# Altium PCB Inc_filter_v2.PcbDoc (part 2 of 4)
Units mm, origin at the board's own origin, x right, y up, seen from the top; angles counter-clockwise.
Board outline 339.6 x 339.6 mm, 2 copper layers (Top Layer, Bottom Layer); 640 components, 290 nets, 1708 pads, 357 vias.
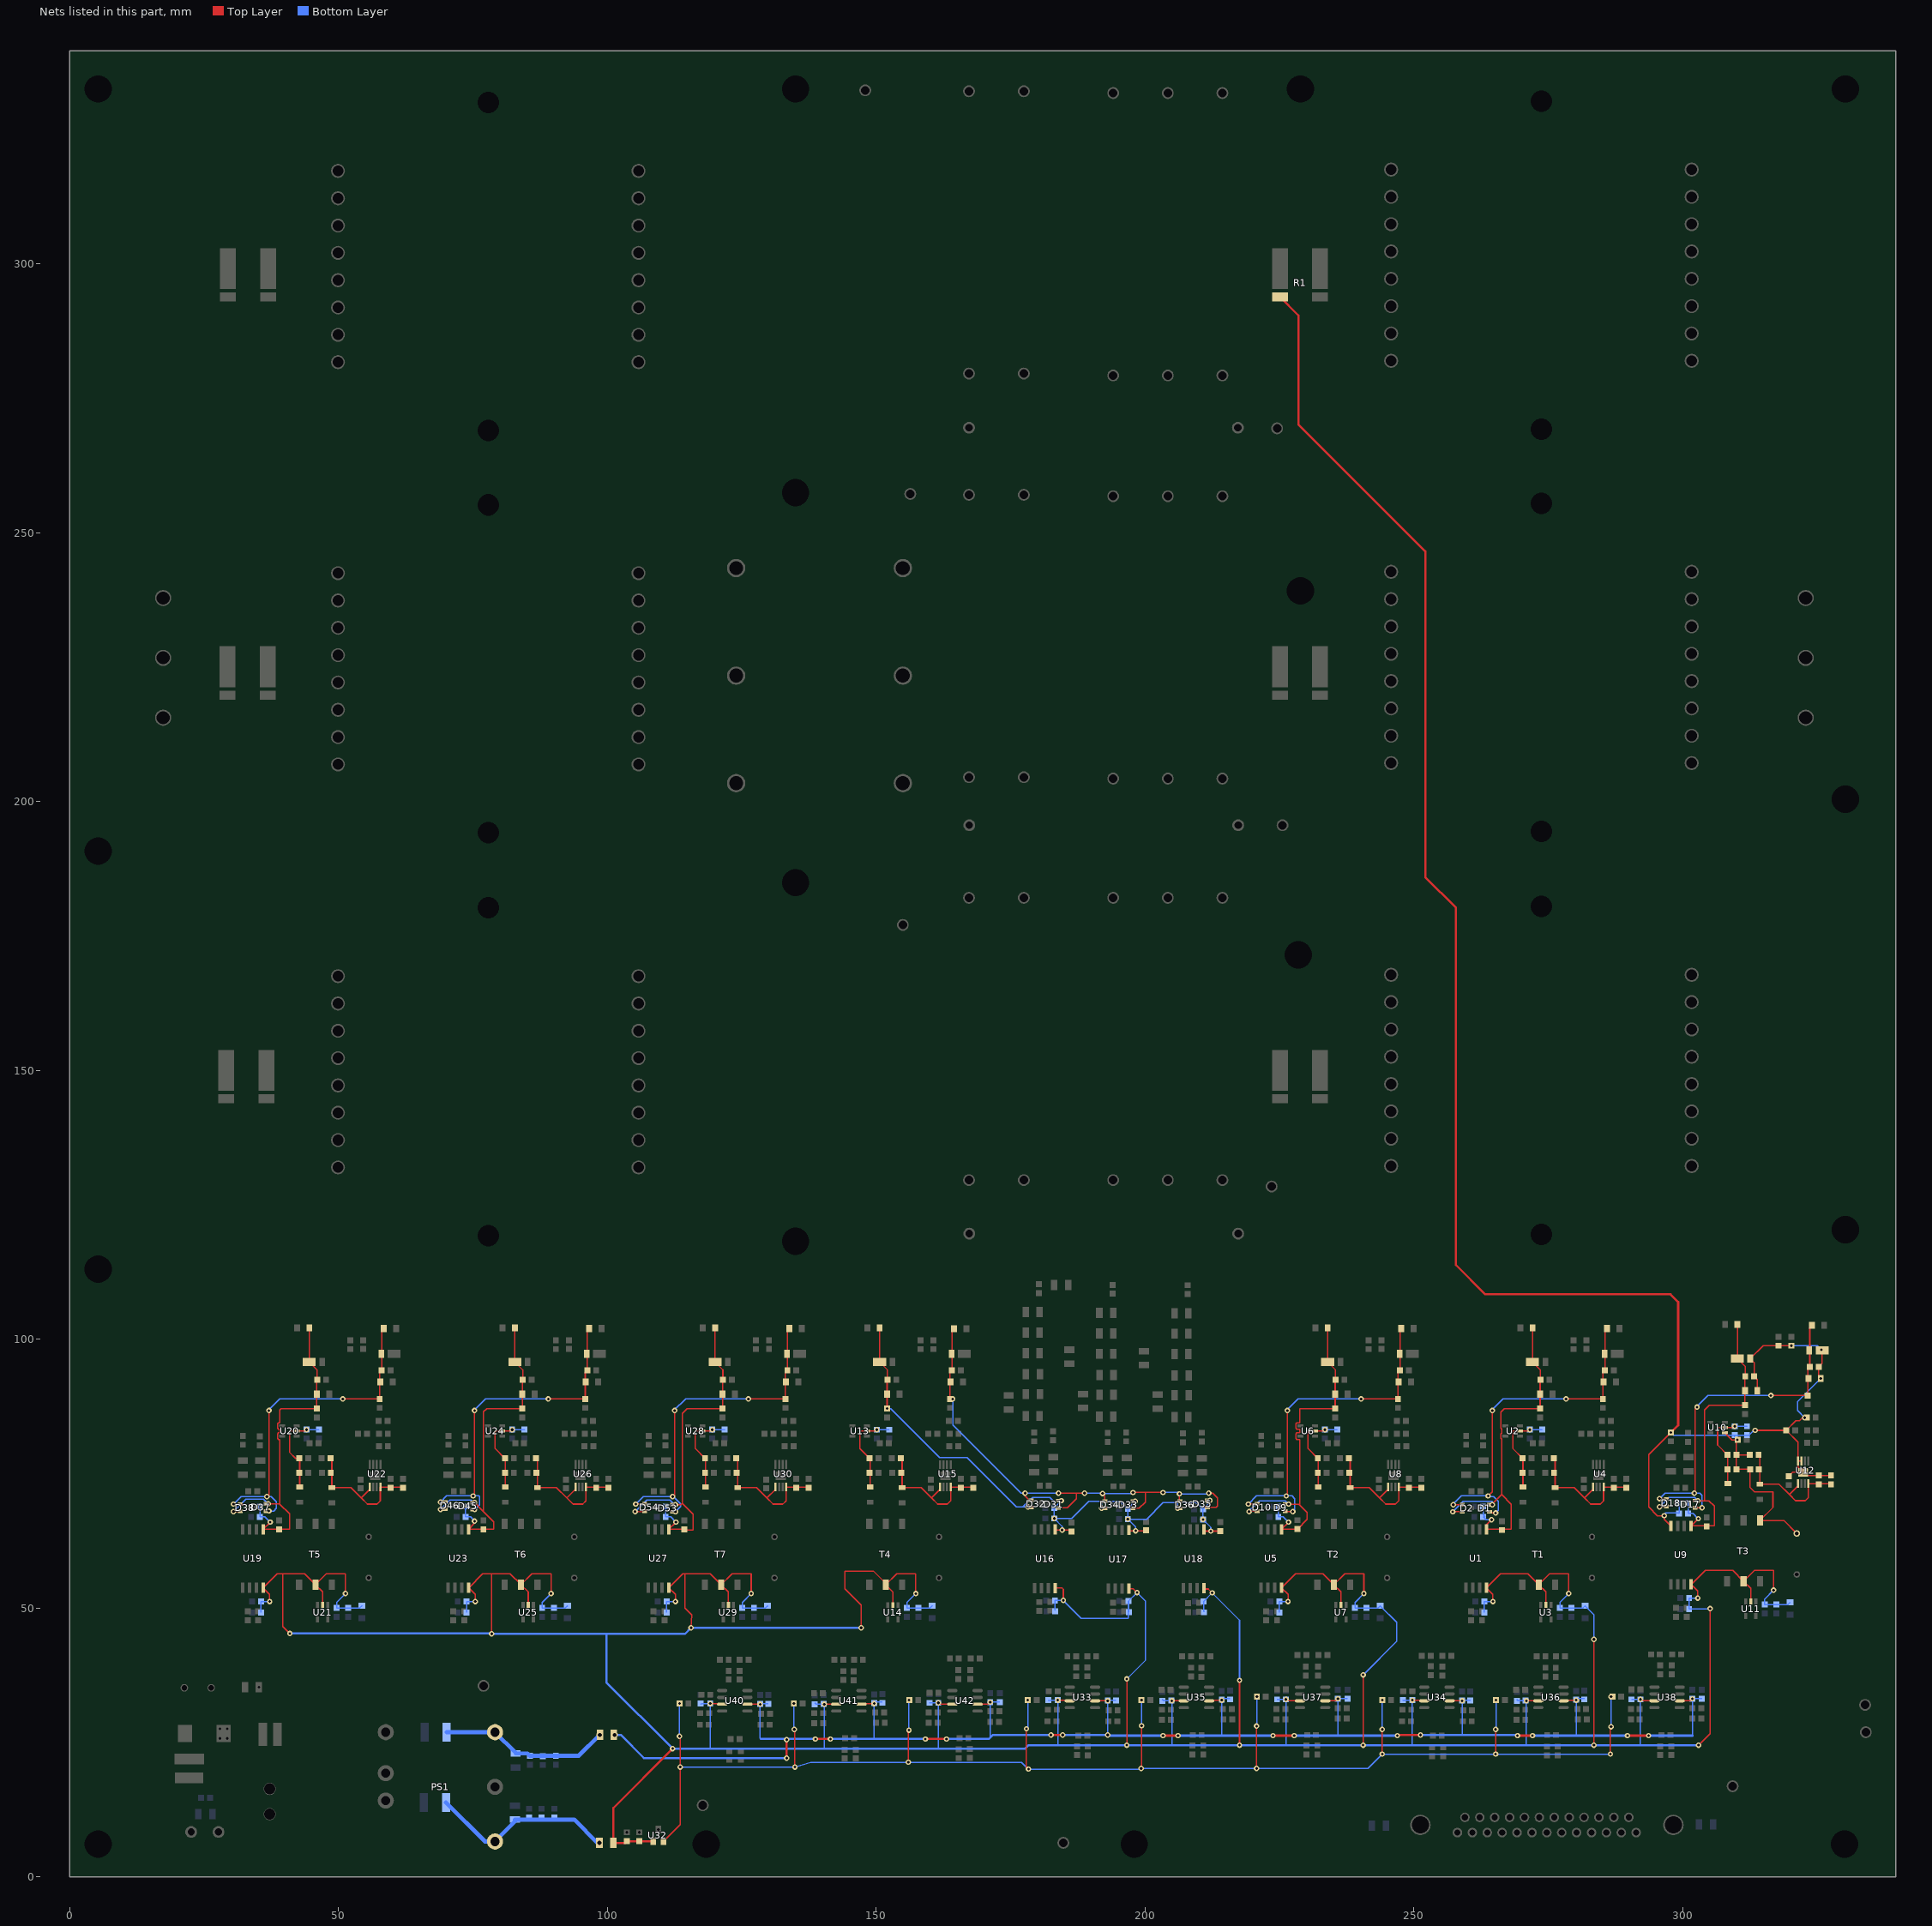
[diagram p2: the nets of this part, all layers, seen from the top]

## Footprints (in the part's own frame and the unit in brackets; to place one, negate y for a bottom-side part, rotate by r counter-clockwise, add the part's x,y. Pads: shape width x height; smd on the part's side, far side on the other; paste and mask are expansions set on the pad) (continued)
"6-DIP Module" [mm] "PYB10"
  round 3 hole 1.7: 1(0,-7.62) 2(0,-12.7) 3(20.32,-20.32) 4(20.32,-10.16) 5(20.32,0) 6(0,0)
  silkscreen extent -15.24,-22.86 35.56,2.54
8-TSSOP [mm]
  rect 0.4x1.6 smd mask+0: 1(-0.975,-2.1) 2(-0.325,-2.1) 3(0.325,-2.1) 4(0.975,-2.1) 5(0.975,2.1) 6(0.325,2.1) 7(-0.325,2.1) 8(-0.975,2.1)
  rect 1.89x1.57 smd mask+0: 9(0,0)
  round 0.4 on Top Overlay: ""(-1.8,-2.8)
"0603 (1608 Metric)" [mm]
  rect 1.1x1.1 smd: 1(-0.825,0) 2(0.825,0)
  silkscreen extent -1.65,-0.84 1.65,0.84, body extent -1.02,-0.51 1.02,0.51, height 0.5
"0805 (2012 metric)" [mm]
  rect 1.1x1.3 smd: 1(-1.15,0) 2(1.15,0)
  silkscreen extent -2.05,-1 2.05,1
"0805 (2012 Metric) Diode" [mm]
  rect 1.1x1.3 smd: A(-1.15,0) K(1.15,0)
  silkscreen extent -2.05,-1 2.05,2.3
1206 [mm] "1206\" surface mount"
  rect 1.2x1.9 smd: 1(-1.3,0) 2(1.3,0)
  silkscreen extent -2.25,-1.3 2.25,1.3, body extent -1.6,-0.72 1.6,0.73, height 1
"1812 (4532 Metric)" [mm]
  rect 3.5x1.5 smd: 1(0,-2.05) 2(0,2.05)
  silkscreen extent -2.25,-3.25 2.25,3.25, body extent -1.63,-2.25 1.57,2.25, height 1.5
"Axial 50mm" [mm]
  round 2.2 hole 1.4: 1(0,0) 2(50,0)
  silkscreen extent 2.5,-5 47.7,5
"CM Choke" [mm] "Vertical, 6 PC Pin"
  round 3.4 hole 2.6: 1(-20,-15.5) 2(0,-15.5) 3(20,-15.5) 4(20,15.5) 5(0,15.5) 6(-20,15.5)
  silkscreen extent -28.1,-18.5 27.9,18.5
"Connector D-Sub Receptacle 25 pos" [mil] "Connector D-sub Receptacle 25 pos, Digi-Key: A35111-ND"
  round 70 hole 45: 1(-654.33,-55.91) 2(-545.28,-55.91) 3(-436.22,-55.91) 4(-327.17,-55.91) 5(-218.11,-55.91) 6(-109.06,-55.91) 7(0,-55.91) 8(109.06,-55.91) 9(218.11,-55.91) 10(327.17,-55.91) 11(436.22,-55.91) 12(545.28,-55.91) 13(654.33,-55.91) 14(599.8,55.91) 15(490.75,55.91) 16(381.69,55.91) 17(272.64,55.91) 18(163.58,55.91) 19(54.53,55.91) 20(-54.53,55.91) 21(-163.58,55.91) 22(-272.64,55.91) 23(-381.69,55.91) 24(-490.75,55.91) 25(-599.8,55.91)
  round 150 hole 125.2: 26(-925.98,0) 27(925.98,0)
  silkscreen extent -1080,-200 1060,201
"Ind SM 4_7UH" [mm] "732-1008-1-ND"
  rect 4.3x1.6 smd: 1(0,0) 2(0,2.7)
  silkscreen extent -2.9,-1.5 2.8,4
"Ind SM 56UH" [mm] "732-4102-1-ND"
  rect 5.3x2 smd: 1(0,0)
  rect 5.5x2 smd: 2(0,3.5)
  silkscreen extent -3.17,-1.5 3.17,4.9
IND_PM6249 [mm]
  round 2.6 hole 2: 1(-17.78,-27.94) 2(-12.7,-27.94) 3(-7.62,-27.94) 4(-2.54,-27.94) 5(2.54,-27.94) 6(7.62,-27.94) 7(12.7,-27.94) 8(17.78,-27.94) 9(17.78,27.94) 10(12.7,27.94) 11(7.62,27.94) 12(2.54,27.94) 13(-2.54,27.94) 14(-7.62,27.94) 15(-12.7,27.94) 16(-17.78,27.94)
  round 1 hole 4 unplated: ""(-30.48,0) ""(30.48,0)
  silkscreen extent -35,-38 35,38
"Panasonic ECA-1HM331" [mm]
  round 1.4 hole 1: 1(0,0) 2(5,0)
  silkscreen extent -4.2,-5 7.5,5
POWERDI [mm]
  rect 2.4x1.5 smd mask+0.07: 1(2.375,0)
  rect 1.05x1.5 smd mask+0.07: 2(0,0)
  silkscreen extent -1.1,-1.5 4.5,1.5
RAD-0.3 [mm] "Radial Cap, Thru-Hole; 2 Leads; 0.3 in Pin Spacing"
  round 1.2 hole 0.7: 1(-3.81,0) 2(3.81,0)
  silkscreen extent -5.71,-1.91 5.71,1.91
"Radial - 4 Leads" [mm]
  round 2.2 hole 1.6: 1(-26.25,5.1) 2(-26.25,-5.1) 3(26.25,-5.1) 4(26.25,5.1)
  silkscreen extent -28.75,-12.5 28.75,12.5
"Radial - 4 Leads - 30uF" [mm]
  round 2.2 hole 1.6: 1(-26.25,10.15) 2(-26.25,0) 3(-26.25,-10.15) 4(26.25,-10.15) 5(26.25,0) 6(26.25,10.15)
  silkscreen extent -28.75,-15 28.75,15
"Res Precision CSM3637Z" [mm]
  rect 7.62x2.95 smd: 1(0,0) 4(0,7.47)
  rect 1.68x2.95 smd: 2(5.26,0) 3(5.26,7.47)
  silkscreen extent -4.4,-2 6.6,9.5
SMCJ48A [mm]
  rect 2.6x3.2 smd mask+0.07: 1(7.2,0) 2(0,0)
  silkscreen extent -2.1,-2.1 9.4,2.2
SO8_L [mm] "SOIC, 8-Leads, Body 4.9x3.9mm, Pitch 1.27mm, IPC High Density"
  oval 1.9x0.6 smd: 1(-2.35,1.905) 2(-2.35,0.635) 3(-2.35,-0.635) 4(-2.35,-1.905) 5(2.35,-1.905) 6(2.35,-0.635) 7(2.35,0.635) 8(2.35,1.905)
  silkscreen extent -2.47,-2.5 1,2.88, body extent -2,-2.5 2,2.5, height 1.75
SOD-123 [mm]
  rect 0.91x1.22 smd: 1(0,0) 2(2.815,0)
  silkscreen extent 1.14,-0.33 1.5,0.33
SOIC8 [mm]
  rect 0.64x1.905 smd mask+0.076: 1(0,0) 2(1.27,0) 3(2.54,0) 4(3.81,0) 5(3.81,10.9) 6(2.54,10.9) 7(1.27,10.9) 8(0,10.9)
  silkscreen extent -1.3,0.3 4.57,9.6
SOT23-5 [mm] "SOT23-5 for REF2030, TI"
  rect 0.6x1.1 smd: 1(-0.95,-1.35) 2(0,-1.35) 3(0.95,-1.35) 4(0.95,1.35) 5(-0.95,1.35)
  silkscreen extent -2.29,-1.77 1.78,2.03
SOT323_ESD [mm]
  rect 0.7x0.9 smd: 1(-0.65,-1.9) 2(0.65,-1.9) 3(0,-0.1)
  silkscreen extent -1.5,-1.6 1.5,-0.3
SOT_23 [mm]
  rect 1x1.4 smd: 1(-0.95,-1.1) 2(0.95,-1.1) 3(0,1.1)
  round 0.4 on Top Overlay: ""(-1.27,0.127)
  silkscreen extent -1.78,-2.16 1.78,2.16, body extent -1.48,-1.28 1.52,0.97, height 1.25
"Terminal Barrier 3PIN" [mm] "CONN BARRIER STRIP 3CIRC 0.438\""
  round 3 hole 2.4: 1(-11.125,0) 2(0,0) 3(11.125,0)
  silkscreen extent -17.8,-15.4 17.8,5.1
"Toggle SW" [mil] "360-3289-ND"
  round 90 hole 81: 1(0,185) 2(0,370)
  silkscreen extent -98,-114 91,472
TP_1.6mm [mm]
  round 2.2 hole 1.6: 1(0,0)
"Xmr SN6501" [mm] "Xmr SN6501"
  rect 1.9x1.14 smd: 1(0,0) 2(0,-3.05) 3(0,-6.1) 4(11.31,-6.1) 5(11.31,-3.05) 6(11.31,0)
  silkscreen extent 0,-6.7 9.4,1.4

## Part data
C1 C2 C4: library part "Cap Film Radial - 4 Leads - 30uF", "Radial - 4 Leads", part=BC3122-ND
C3 C6 C9: "Radial - 4 Leads", part=BC2763-ND
C5: library part "Cap Alum 330uF 50V", "Capacitor Aluminum 330uF 50V", part=P5184-ND
C7: "CAP CER 1UF 50V X7R 1206", part=1276-1068-1-ND
C8 C195: library part "Cap 3kV 220pF", "CAP CER 1000PF 2KV X7R 1812", part=399-3447-1-ND
C10 C11 C35 C36 C60 C61 C105 C106 C110 C111 C115 C116 C120 C121 C145 C146 C170 C171: "CAP CER 1UF 50V X5R 0603", part=1276-1860-1-ND
C12 C13 C18 C20 C22 C25 C27 C29 C31 C37 C38 C43 C45 C47 C50 C52 C54 C56 C62 C63 C68 C70 C72 C75 C77 C79 C81 C88 C90 C92 C95 C97 C99 C101 C107 C108 C112 C113 C117 C118 C122 C123 C128 C130 C132 C135 C137 C139 C141 C147 C148 C153 C155 C157 C160 C162 C164 C166 C172 C173 C178 C180 C182 C185 C187 C189 C191 C200 C203 C209 C212 C213 C214 C216 C218 C220 C226 C227 C228 C230 C232 C234 C240 C241 C242 C244 C246 C248 C255 C256 C258 C262 C263 C265 C269 C270 C272 C276: "CAP CER 0.1UF 50V Y5V 0603", part=311-1343-6-ND
C14 C39 C64 C109 C114 C119 C124 C149 C174: "CAP CER 330PF 50V C0G 0603", part=445-7033-2-ND
C15 C40 C65 C85 C125 C150 C175: library part Cap, "CAP CER 1000PF 1KV Y5P RADIAL", LatestRevisionDate=17-Jul-2002, LatestRevisionNote="Re-released for DXP Platform.", PackageDescription="Radial Cap, Thru-Hole; 2 Leads; 0.3 in Pin Spacing", PackageReference=RAD-0.3, part=1251PH-ND, Published=8-Jun-2000, Publisher="Altium Limited"
C16 C19 C21 C24 C26 C28 C33 C41 C44 C46 C49 C51 C53 C58 C66 C69 C71 C74 C76 C78 C83 C86 C89 C91 C94 C96 C98 C103 C126 C129 C131 C134 C136 C138 C143 C151 C154 C156 C159 C161 C163 C168 C176 C179 C181 C184 C186 C188 C193 C202 C205 C208 C215 C217 C219 C221 C229 C231 C233 C235 C243 C245 C247 C249 C257 C259 C264 C266 C271 C273: "CAP CER 10UF 35V X5R 0805", part=490-10515-1-ND
C17 C42 C67 C87 C127 C152 C177: "CAP CER 22UF 35V X5R 0805", part=445-14428-1-ND
C23 C32 C48 C57 C73 C82 C93 C102 C133 C142 C158 C167 C183 C192: "CAP CER 4.7UF 50V X5R 0805", part=445-5980-1-ND
C30 C34 C55 C59 C80 C84 C100 C104 C140 C144 C165 C169 C190 C194: "CAP CER 10000PF 100V X7R 0603", part=478-7418-1-ND
C196 C197: "CAP CER 100UF 10V JB 1206", part=445-11682-1-ND
C201 C204: "CAP CER 0603 10NF 50V U2J 5%", part=399-13384-1-ND
C210 C211 C222 C223 C224 C225 C236 C237 C238 C239 C250 C251 C254 C260 C261 C267 C268 C274 R106 R107 R110 R111 R112 R113 R116 R118 R122 R123 R126 R127 R128 R129 R132 R134 R138 R139 R142 R143 R144 R145 R148 R150 R153 R155 R156 R158 R161 R163 R164 R166 R169 R171 R172 R174: "NC"
C275: "CAP CER 10UF 50V X5R 1206", part=587-3248-1-ND
D1 D2 D9 D10 D17 D18 D31 D32 D33 D34 D35 D36 D37 D38 D45 D46 D53 D54: library part Diode_ESD, "TVS DIODE", part=ESD1P0RFWH6327XTSA1CT
D3 D6 D11 D14 D19 D22 D25 D28 D39 D42 D47 D50 D55 D58: "DIODE SCHOTTKY 20V 500MA SOD123", part=MBR0520LT1GOSCT-ND
D4 D7 D12 D15 D20 D23 D26 D29 D40 D43 D48 D51 D56 D59: "LED 0805"
D5 D8 D13 D16 D21 D24 D27 D30 D41 D44 D49 D52 D57 D60: "DIODE ZENER POWERDI123", part=DFLZ6V2DICT-ND
FB1 FB2 FB3 FB4 FB5 FB6 FB7 FB8 FB9 FB10 FB11 FB12 FB13 FB14 FB15 FB16 FB17 FB18 FB19 FB20 FB21 FB22 FB23 FB24 FB25 FB26 FB27 FB28 FB29: "FERRITE BEAD 1 KOHM 0603 1LN", part=445-8672-1-ND
J1: library part "Conn D-Sub Receptacle 25 positions", "D-Sub Receptacle 25 Position A35111-ND", part=A35111-ND
L5: library part "CMC 1.5MH 20A", "CM Choke 2.2MH 16A 3LN TH", part=.495-7001-ND
L8: library part "Inductor 10uH", "FIXED IND 56UH 700MA 481 MOHM", part=732-4102-1-ND
L9: library part "Inductor 10uH", "FIXED IND 4.7UH 1.2A 105 MOHM", part=732-1008-1-ND
P1: library part "2 pin Terminal", "2 pin Terminal", part=ED2902-ND
P2 P3: library part "Terminal Blocks - Barrier Blocks", "CONN BARRIER STRIP 3CIRC 0.325\"", part=A98461-ND
PS1: "DC/DC CONVERTER +/-5V 10W", part=102-2849-ND
R1 R2 R4 R5 R7 R8: "RES SMD 0.02 OHM 0.1% 2W 3637", part=Y1473-.05CCT-ND
R3 R6 R9: "RES 5.0 OHM 10W 1% WW AXIAL", part=RSD-5.0RCT-ND
R10 R19 R28 R41 R53 R65 R77 R86 R95: library part "Resistor 0603", "Resistor 0603"
R11 R14 R20 R23 R29 R32 R44 R52 R56 R64 R68 R76 R78 R81 R87 R90 R96 R99: "12 Ohm ∮0.5% 0.25W, 1/4W Chip Resistor 1206", part=311-2961-1-ND
R12 R13 R21 R22 R30 R31 R45 R48 R57 R60 R69 R72 R79 R80 R88 R89 R97 R98: "RES SMD 10 OHM 0.05% 1/10W 0603", part=RNCF0603AKT10R0CT-ND
R15 R17 R24 R26 R33 R35 R37 R39 R82 R84 R91 R93 R100 R102: "RES SMD 3.9K OHM 5% 1/10W 0603", part=541-3.9KGCT-ND
R16 R25 R34 R38 R83 R85 R101: "RES SMD 32.4KOHM 0.5% 1/10W 0603", part=311-32.4KDCT-ND
R18 R27 R36 R40 R92 R94 R103: "RES SMD 10K OHM 0.5% 1/16W 0603", part=RR08P10.0KDCT-ND
R42 R43 R49 R54 R55 R61 R66 R67 R73 R201 R202 R203 R205 R206 R207: "RES SMD 332K OHM 0.1% 1/4W 1206", part=RG32P332KBCT-ND
R46 R58 R70: "RES SMD 1K OHM 0.1% 1/4W 1206", part=P1.0KBCCT-ND
R50 R62 R74: "RES SMD 402K OHM 0.1% 1/4W 1206", part=P402KBCCT-ND
R104 R105 R108 R109 R114 R115 R117 R119 R120 R121 R124 R125 R130 R131 R133 R135 R136 R137 R140 R141 R146 R147 R149 R151 R152 R154 R157 R159 R160 R162 R165 R167 R168 R170 R173 R175: "RES SMD 499 OHM 0.1% 1/10W 0603", part=RG16P499BCT-ND
R181 R182 R183 R184 R185 R186 R187 R188 R189 R190 R191 R192 R193 R194 R195 R196 R197 R198: "RES SMD 49.9 OHM 0.5% 1/16W 0603", part=RR08Q49.9DCT-ND
T1 T2 T3 T4 T5 T6 T7: "TRANSFORMER SMD TR1.7 SN6501", part=1297-1107-1-ND
TP1 TP2 TP3 TP4 TP5 TP6 TP7 TP8 TP9 TP10 TP11 TP12: library part Testpoint
U1 U5 U9 U16 U17 U18 U19 U23 U27: "IC OPAMP ISOLATION 100KHZ 8SOIC", part=296-38822-5-ND
U2 U6 U10 U13 U20 U24 U28: "IC REG LDO 5V 0.15A SOT23-5", part=296-39287-1-ND
U3 U7 U11 U14 U21 U25 U29: "IC REG CONV PWR SUPPLIES SOT23-5", part=296-37700-1-ND
U4 U8 U12 U15 U22 U26 U30: "IC REG LDO NEG ADJ 0.2A 8MSOP", part=296-27750-1-ND
U32: "Series Voltage Reference IC ∮0.2% 25mA SOT-23-3", part=ISL21010CFH315Z-TKCT-ND
U33 U34 U35 U36 U37 U38 U40 U41 U42: "IC OPAMP DIFF 360MHZ 8MSOP", part=AD8132WARMZ-R7CT-ND
D61: part=495-2402-ND
SW1: part=360-3289-ND

## Free pads (board coordinates)
  round 1.016 hole 0.508: 2(103.632,8.318) 3(105.918,8.318) 4(109.474,8.847) 6(27.94,27.559) 7(29.337,27.559) 8(27.94,25.781) 9(29.337,25.781) 10(35.209,35.306)
  round 3.18 hole 5.08: MH1(5.334,6.096) MH1(5.334,113.03) MH1(5.334,190.754) MH1(5.334,332.486) MH1(118.364,6.096) MH1(135.001,118.237) MH1(135.001,184.912) MH1(135.001,257.429) MH1(135.001,332.486) MH1(197.993,6.096) MH1(228.473,171.45) MH1(228.854,239.141) MH1(228.854,332.486) MH1(330.073,6.096) MH1(330.2,120.396) MH1(330.2,200.406) MH1(330.2,332.486)

## Via types
v1: diameter 1.016, hole 0.508, Top Layer to Bottom Layer, 354 vias
v2: diameter 1.27, hole 0.762, Top Layer to Bottom Layer, 3 vias

## Nets (pads, with @x,y where several pads share a name; then routed paths per layer and width w, separated by ;. In a path a pad name is that pad's centre, name@x,y a point inside that pad or via, vN(x,y) a via of type N, cw(c..) or ccw(c..) an arc to the next point about the centre after c; other vN are vias at no path point)
1V5_ref: R106.1 R107.1 R122.1 R123.1 R138.1 R139.1 R153.1 R161.1 R169.1 U32.2 | length 295.6
  Top Layer w0.2: v1(134.747,27.432) 135.001,27.178 134.874,27.051 v1(134.874,20.447) ; v1(155.956,21.336) 155.956,26.924 155.829,27.051 v1(156.083,27.305) ; v1(177.927,27.559) 177.927,20.447 v1(178.308,20.066) ; v1(199.263,20.193) 199.327,20.257 v1(199.327,28.131) ; v1(220.726,20.193) v1(220.726,28.067) ; R138.1@220.726,33.528 v1(220.79,33.528) ; v1@244.094,22.987 v1(244.094,27.432) ; v1(265.176,22.86) v1(265.176,27.432) ; v1(286.512,22.86) 286.512,27.813 v1(286.639,27.94) ; v1(286.639,33.528) R139.1@286.703,33.528
  Top Layer w0.254: U32.2@110.424,6.647 113.538,9.761 v1(113.538,20.447) 113.538,26.035 v1(113.411,26.162)
  Bottom Layer w0.2: v1(113.411,26.162) v1(113.411,26.162) ; v1(113.538,20.447) v1(134.874,20.447) ; v1(134.685,32.258) 134.685,27.494 v1(134.747,27.432) ; 137.795,21.336 v1(155.956,21.336) 177.038,21.336 v1(178.308,20.066) 199.136,20.066 v1(199.263,20.193) v1(220.726,20.193) 241.427,20.193 v1(244.094,22.86) v1(265.176,22.86) v1(286.512,22.86) ; v1(156.083,27.305) v1(156.083,27.305) v1(156.084,32.893) ; v1(177.927,27.559) 178.181,27.813 v1(178.181,32.893) ; v1(199.327,28.131) v1(199.327,32.893) ; v1(220.726,28.067) 220.79,28.003 v1(220.79,33.528) ; v1(244.094,27.432) v1(244.094,32.893) ; v1(265.176,27.432) 265.24,27.496 v1(265.24,32.893) ; v1(286.639,27.94) v1(286.639,33.528)
  Bottom Layer w0.254: v1(113.411,26.162) v1(113.412,32.258) ; v1(134.874,20.447) 137.795,21.336
+5V_IA1: C60.2 C62.2 C72.2 C73.2 D17.2 D18.2 D20.A D21.1 FB11.2 R28.2 U9.1 | length 67.9
  Top Layer w0.2: v1(295.656,68.834) 295.753,68.931 D18.2@296.926,68.931 ; D17.2@302.26,69.977 v1(302.768,69.977) 304.038,69.977 ; v1(302.863,66.627) U9.1@301.542,65.306 304.256,65.306 304.285,65.277 304.286,65.278 305.816,65.278 305.816,68.961 304.8,69.977 304.038,69.977 ; FB11.2@311.531,87.756 304.919,87.756 304.038,86.875 304.038,69.977
  Top Layer w0.254: D20.A@310.141,102.743 310.134,102.736 D21.1@310.134,96.393 311.595,94.932 C72.2@311.595,93.091 311.531,93.027 FB11.2@311.531,87.756
  Bottom Layer w0.2: v1(295.656,68.834) 297.434,70.612 297.483,70.563 302.182,70.563 v1(302.768,69.977) ; C60.2@300.957,69.544 C62.2@300.957,67.614 301.875,67.614 v1(302.863,66.627)
+5V_IA2: C170.2 C172.2 C182.2 C183.2 D53.2 D54.2 D56.A D57.1 FB28.2 R95.2 U27.1 | length 69.2
  Top Layer w0.2: v1(105.156,67.945) 106.8,67.945 D54.2@106.912,68.057 ; D53.2@112.141,69.215 v1(112.649,69.215) 113.665,69.215 113.919,69.469 ; v1(112.751,65.992) U27.1@111.43,64.671 111.458,64.643 R95.2@114.174,64.643 ; R95.2@114.173,64.642 R95.2@114.174,64.643 ; FB28.2@121.419,87.121 114.807,87.121 113.919,86.233 113.919,69.469 ; 113.919,69.469 115.951,67.437 115.951,64.516 114.301,64.516 R95.2@114.174,64.643
  Top Layer w0.254: D56.A@120.029,102.108 120.022,102.101 D57.1@120.022,95.758 121.483,94.297 C182.2@121.483,92.456 121.419,92.392 FB28.2@121.419,87.121
  Bottom Layer w0.2: v1(105.156,67.945) 107.315,70.104 111.629,70.104 112.518,69.215 v1(112.649,69.215) ; C170.2@110.845,68.909 C172.2@110.845,66.979 111.763,66.979 v1(112.751,65.992)
+5V_IB1: C10.2 C12.2 C22.2 C23.2 D1.2 D2.2 D4.A D5.1 FB3.2 R10.2 U1.1 | length 70
  Top Layer w0.2: v1(257.205,67.915) D2.2@258.953,67.915 ; v1(264.414,66.421) 263.449,65.456 U1.1@263.449,64.671 266.163,64.671 266.192,64.642 266.193,64.643 268.097,64.643 268.097,69.342 266.319,71.12 ; D1.2@264.477,69.278 266.319,71.12 ; FB3.2@273.438,87.121 266.826,87.121 266.155,86.45 266.155,83.455 266.319,83.291 266.319,82.571 266.155,82.407 266.155,81.555 266.319,81.391 266.319,71.12
  Top Layer w0.254: D4.A@272.048,102.108 272.041,102.101 D5.1@272.041,95.758 273.502,94.297 C22.2@273.502,92.456 273.438,92.392 FB3.2@273.438,87.121
  Bottom Layer w0.2: v1(257.205,67.915) 259.14,69.85 264.541,69.85 v1(264.541,69.215) ; C10.2@262.864,68.909 262.864,67.349 263.234,66.979 262.89,66.979 263.448,66.421 v1(264.414,66.421)
+5V_IB2: C145.2 C147.2 C157.2 C158.2 D45.2 D46.2 D48.A D49.1 FB24.2 R86.2 U23.1 | length 67.7
  Top Layer w0.2: v1(68.961,68.326) 69.716,68.326 D46.2@69.828,68.438 ; D45.2@74.952,69.611 v1(75.326,69.611) 76.881,68.056 ; v1@75.057,66.421 v1(75.311,66.167) 75.311,65.77 U23.1@74.212,64.671 R86.2@76.708,64.671 ; R86.2@76.708,64.516 76.835,64.643 78.867,64.643 78.867,66.07 76.881,68.056 ; FB24.2@84.201,87.121 77.589,87.121 76.962,86.494 76.962,84.351 76.918,84.307 76.918,83.455 76.962,83.411 76.962,82.451 76.918,82.407 76.918,81.555 76.962,81.511 76.962,68.056 76.881,68.056
  Top Layer w0.254: D48.A@82.811,102.108 82.804,102.101 D49.1@82.804,95.758 84.265,94.297 C157.2@84.265,92.456 84.201,92.392 FB24.2@84.201,87.121
  Bottom Layer w0.2: v1(68.961,68.326) 70.739,70.104 74.672,70.104 75.165,69.611 v1(75.326,69.611) ; C145.2@73.627,68.909 C147.2@73.627,66.979 74.545,66.979 75.311,66.213 v1(75.311,66.167)
+5V_IC1: C35.2 C37.2 C47.2 C48.2 D9.2 D10.2 D12.A D13.1 FB7.2 R19.2 U5.1 | length 69.9
  Top Layer w0.2: v1(219.329,67.945) 219.441,68.057 D10.2@220.831,68.057 ; D9.2@226.06,69.342 v1(226.695,69.342) 228.6,69.342 ; v1(226.67,65.992) U5.1@225.349,64.671 228.063,64.671 R19.2@228.092,64.642 ; R19.2@228.346,64.707 230.124,66.485 230.124,67.818 228.6,69.342 ; FB7.2@235.338,87.121 228.726,87.121 228.726,84.484 228.232,84.484 228.055,84.307 228.055,83.455 228.232,83.278 228.726,83.278 228.726,82.584 228.232,82.584 228.055,82.407 228.055,81.555 228.232,81.378 228.726,81.378 228.726,69.342 228.6,69.342
  Top Layer w0.254: D12.A@233.948,102.108 233.941,102.101 D13.1@233.941,95.758 235.402,94.297 C47.2@235.402,92.456 235.338,92.392 FB7.2@235.338,87.121
  Bottom Layer w0.2: v1(219.329,67.945) 219.329,68.072 221.234,69.977 226.06,69.977 v1(226.695,69.342) ; C35.2@224.764,68.909 C37.2@224.764,66.979 225.682,66.979 v1(226.67,65.992)
+5V_IC2: C120.2 C122.2 C132.2 C133.2 D37.2 D38.2 D40.A D41.1 FB20.2 R77.2 U19.1 | length 69.7
  Top Layer w0.2: v1(30.48,67.945) 31.653,67.945 D38.2@31.75,68.042 ; D37.2@36.515,69.357 v1(36.942,69.357) 39.101,69.357 39.116,69.342 ; v1(37.306,65.992) U19.1@35.985,64.671 38.699,64.671 38.854,64.516 38.981,64.643 40.894,64.643 40.894,67.564 39.116,69.342 ; FB20.2@45.974,87.121 39.362,87.121 39.116,86.875 39.116,84.484 38.868,84.484 38.691,84.307 38.691,83.455 38.868,83.278 39.116,83.278 39.116,82.584 38.868,82.584 38.691,82.407 38.691,81.555 38.868,81.378 39.116,81.378 39.116,69.342
  Top Layer w0.254: D40.A@44.584,102.108 44.577,102.101 D41.1@44.577,95.758 46.038,94.297 C132.2@46.038,92.456 45.974,92.392 FB20.2@45.974,87.121
  Bottom Layer w0.2: v1(30.48,67.945) 32.766,70.231 36.064,70.231 36.938,69.357 v1(36.942,69.357) ; C120.2@35.4,68.909 C122.2@35.4,66.979 36.318,66.979 v1(37.306,65.992)
+5V_LV: C11.1 C13.1 C16.2 C17.2 C18.2 C36.1 C38.1 C41.2 C42.2 C43.2 C61.1 C63.1 C66.2 C67.2 C68.2 C86.2 C87.2 C88.2 C106.1 C108.1 C111.1 C113.1 C116.1 C118.1 C121.1 C123.1 C126.2 C127.2 C128.2 C146.1 C148.1 C151.2 C152.2 C153.2 C171.1 C173.1 C176.2 C177.2 C178.2 C208.2 C209.2 C214.2 C215.2 C216.2 C217.2 C228.2 C229.2 C230.2 C231.2 C242.2 C243.2 C244.2 C245.2 C256.2 C257.2 C263.2 C264.2 C270.2 C271.2 R180.2 T1.2 T2.2 T3.2 T4.2 T5.2 T6.2 T7.2 U1.8 U3.2 U5.8 U7.2 U9.8 U11.2 U14.2 U16.8 U17.8 U18.8 U19.8 U21.2 U23.8 U25.2 U27.8 U29.2 U32.1 U33.3 U34.3 U35.3 U36.3 U37.3 U38.3 U40.3 U41.3 U42.3 | length 971.3
  Top Layer w0.2: v1(37.204,51.231) 37.204,52.552 U19.8@35.985,53.771 38.602,56.388 39.624,56.388 ; v1(40.957,45.276) 39.624,46.609 39.624,56.388 ; T5.2@45.72,54.356 43.688,56.388 39.624,56.388 ; v1(75.431,51.231) 75.431,52.552 U23.8@74.212,53.771 76.829,56.388 78.359,56.388 ; v1(78.486,45.212) 78.486,56.261 78.359,56.388 ; T6.2@83.947,54.356 81.915,56.388 78.359,56.388 ; v1(112.649,51.231) 112.649,52.552 U27.8@111.43,53.771 114.047,56.388 114.427,56.388 ; v1(115.57,46.355) 115.697,48.768 114.427,50.038 114.427,56.388 ; v1(119.127,32.258) 121.222,32.258 U40.3@121.349,32.131 ; T7.2@121.165,54.356 119.133,56.388 114.427,56.388 ; v1(140.336,32.131) U41.3@142.558,32.131 ; v1(161.545,32.385) 161.799,32.131 U42.3@164.148,32.131 ; v1(183.769,32.893) 185.864,32.893 U33.3@185.991,32.766 ; v1(204.978,32.766) U35.3@207.2,32.766 ; v1(226.187,33.02) 226.441,32.766 U37.3@228.79,32.766 ; v1(226.568,51.231) 226.568,52.552 U5.8@225.349,53.771 227.966,56.388 233.052,56.388 T2.2@235.084,54.356 ; v1(249.682,32.893) 251.777,32.893 U34.3@251.904,32.766 ; v1(264.668,51.231) 264.668,52.552 U1.8@263.449,53.771 266.066,56.388 271.152,56.388 T1.2@273.184,54.356 ; v1(270.891,32.766) U36.3@273.113,32.766 ; v1(292.1,33.02) 292.354,32.766 U38.3@294.703,32.766 ; v1(302.761,51.866) 302.761,53.187 U9.8@301.542,54.406 304.159,57.023 309.245,57.023 T3.2@311.277,54.991 ; v1(302.895,24.511) 305.054,26.67 v1(305.054,49.911)
  Top Layer w0.254: U21.2@47.056,50.579 47.056,53.02 T5.2@45.72,54.356 47.752,56.388 51.308,56.388 v1(51.308,52.705) ; U25.2@85.283,50.579 85.283,53.02 T6.2@83.947,54.356 85.979,56.388 89.535,56.388 v1(89.535,52.705) ; U29.2@122.501,50.579 122.501,53.02 T7.2@121.165,54.356 123.197,56.388 126.753,56.388 v1(126.753,52.705) ; v1(147.193,46.355) 147.193,50.546 144.145,53.594 144.145,56.896 149.479,56.896 151.765,54.61 T4.2@151.765,54.349 ; U14.2@153.101,50.572 153.101,53.013 T4.2@151.765,54.349 ; v1(157.353,52.698) 157.353,56.381 153.797,56.381 T4.2@151.765,54.349 ; U16.8@183.291,53.743 184.531,53.743 184.785,53.489 v1(184.785,51.435) ; v1(196.596,24.511) v1(196.596,36.83) ; U17.8@196.976,53.615 197.78,53.615 v1(198.5,52.895) ; U18.8@210.947,53.552 211.751,53.552 v1(212.471,52.832) ; v1(217.551,24.511) v1(217.551,36.576) ; U7.2@236.42,50.579 236.42,53.02 T2.2@235.084,54.356 237.116,56.388 240.672,56.388 v1(240.672,52.705) ; v1(240.538,24.511) v1(240.538,37.592) ; U3.2@274.52,50.579 274.52,53.02 T1.2@273.184,54.356 275.216,56.388 278.772,56.388 v1(278.772,52.705) ; v1(283.464,24.511) v1(283.464,44.196) ; U11.2@312.613,51.214 312.613,53.655 T3.2@311.277,54.991 313.309,57.023 316.865,57.023 v1(316.865,53.34)
  Top Layer w0.4: U32.1@108.524,6.647 108.503,6.668 C208.2@105.918,6.668 C209.2@103.632,6.668 103.314,6.35 R180.2@101.122,6.35 101.122,12.857 v1(112.141,23.876)
  Bottom Layer w0.2: C121.1@35.591,49.199 C123.1@35.591,51.231 v1(37.204,51.231) ; C146.1@73.818,49.199 C148.1@73.818,51.231 v1(75.431,51.231) ; C171.1@111.036,49.199 C173.1@111.036,51.231 v1(112.649,51.231) ; C256.2@117.349,32.258 117.476,32.131 117.603,32.258 v1(119.127,32.258) 119.127,23.876 ; C263.2@138.558,32.385 138.812,32.131 v1(140.336,32.131) 140.336,23.876 ; C270.2@159.894,32.385 v1(161.545,32.385) 161.545,23.876 ; C214.2@181.991,32.893 182.118,32.766 182.245,32.893 v1(183.769,32.893) 183.769,24.511 ; C108.1@183.227,51.435 v1(184.785,51.435) 188.087,48.133 196.85,48.133 196.85,49.276 C111.1@196.976,49.402 ; C228.2@203.2,33.02 203.454,32.766 v1(204.978,32.766) 204.978,24.511 ; C242.2@224.536,33.02 v1(226.187,33.02) 226.187,24.511 ; C36.1@224.955,49.199 C38.1@224.955,51.231 v1(226.568,51.231) ; C216.2@247.904,32.893 248.031,32.766 248.158,32.893 v1(249.682,32.893) 249.682,24.511 ; C11.1@263.055,49.199 C13.1@263.055,51.231 v1(264.668,51.231) ; C230.2@269.113,33.02 269.367,32.766 v1(270.891,32.766) 270.891,24.511 ; C244.2@290.449,33.02 v1(292.1,33.02) 292.1,24.511 ; v1(302.761,51.866) C63.1@301.148,51.866 C61.1@301.148,49.834 304.977,49.834 v1(305.054,49.911)
  Bottom Layer w0.254: v1(51.308,52.705) 49.657,51.054 C128.2@49.657,50.037 C126.2@51.816,50.037 53.967,50.037 C127.2@54.356,50.426 ; v1(89.535,52.705) 87.884,51.054 C153.2@87.884,50.037 C151.2@90.043,50.037 92.194,50.037 C152.2@92.583,50.426 ; v1(126.753,52.705) 125.102,51.054 C178.2@125.102,50.037 C176.2@127.261,50.037 129.412,50.037 C177.2@129.801,50.426 ; v1(157.353,52.698) 155.702,51.047 C88.2@155.702,50.03 C86.2@157.861,50.03 160.012,50.03 C87.2@160.401,50.419 ; C106.1@183.227,49.594 C108.1@183.227,51.435 ; v1(196.596,36.83) 200.025,40.259 200.025,51.37 v1(198.5,52.895) C113.1@196.912,51.307 196.912,49.466 C111.1@196.976,49.402 ; C116.1@210.947,49.339 210.883,49.403 C118.1@210.883,51.244 v1(212.471,52.832) 217.551,47.752 v1(217.551,36.576) ; v1(240.538,37.592) 246.761,43.815 246.761,47.385 C42.2@243.72,50.426 243.331,50.037 C41.2@241.18,50.037 C43.2@239.021,50.037 239.021,51.054 v1(240.672,52.705) ; v1(278.772,52.705) 277.121,51.054 C18.2@277.121,50.037 C16.2@279.28,50.037 281.431,50.037 C17.2@281.82,50.426 283.464,48.782 v1(283.464,44.196) ; v1(316.865,53.34) 315.214,51.689 C68.2@315.214,50.672 C66.2@317.373,50.672 319.524,50.672 C67.2@319.913,51.061
  Bottom Layer w0.4: v1@40.831,45.276 v1(40.957,45.276) 78.422,45.276 v1(78.486,45.212) 99.822,45.212 ; v1(147.193,46.355) v1(115.57,46.355) 114.427,45.212 99.822,45.212 ; v1(302.895,24.511) 292.1,24.511 v1(283.464,24.511) 270.891,24.511 249.682,24.511 v1(240.538,24.511) 226.187,24.511 v1(217.551,24.511) 204.978,24.511 v1(196.596,24.511) 183.769,24.511 178.308,24.511 177.673,23.876 161.545,23.876 140.336,23.876 119.127,23.876 v1(112.141,23.876) 99.822,36.195 99.822,45.212
+5V_LV_PRE: C8.2 C196.2 C200.2 C201.2 C202.2 PS1.3 R180.1 | length 35.2
  Bottom Layer w0.762: C8.2@69.995,13.843 77.234,6.604 PS1.3@79.121,6.604 82.804,10.287 C196.2@82.804,10.668 93.853,10.668 98.171,6.35 v2(98.522,6.35)
+5V_PH: C92.2 C93.2 C105.2 C107.2 C110.2 C112.2 C115.2 C117.2 D26.A D27.1 D31.2 D32.2 D33.2 D34.2 D35.2 D36.2 FB13.2 R41.2 R53.2 R65.2 U16.1 U17.1 U18.1 | length 125.6
  Top Layer w0.2: v1(178.181,68.834) 178.689,68.834 D32.2@178.816,68.707 ; v1(183.1,66.675) v1@183.254,66.675 ; v1(196.785,66.547) v1@196.978,66.547 ; v1(210.756,66.484) v1@211.01,66.484
  Top Layer w0.254: D26.A@150.629,102.101 150.622,102.094 D27.1@150.622,95.751 152.083,94.29 C92.2@152.083,92.449 152.019,92.385 v1(152.019,87.114) ; U16.1@183.291,64.643 183.291,64.262 183.545,64.516 v1(184.561,64.516) R41.2@186.086,64.516 ; D31.2@183.896,69.977 v1(184.404,69.977) ; v1(191.897,68.58) 192.495,68.58 D34.2@192.51,68.565 ; U17.1@196.976,64.515 196.976,64.134 197.23,64.388 v1(198.246,64.388) R53.2@199.771,64.388 ; D33.2@197.761,69.865 v1(198.135,69.865) ; v1(206.009,68.565) D36.2@206.48,68.565 ; U18.1@210.947,64.452 210.947,64.071 211.201,64.325 v1(212.217,64.325) R65.2@213.742,64.325 ; D35.2@211.582,70.007 v1(212.06,70.007)
  Bottom Layer w0.2: v1(152.019,87.114) 152.662,87.114 161.798,77.978 166.878,77.978 176.022,68.834 177.292,68.834 ; v1(178.181,68.834) 177.292,68.834 ; v1(183.1,66.675) 186.309,66.675 189.499,69.865 191.897,69.865 195.372,69.865 C112.2@196.785,68.452 ; C107.2@183.1,68.58 183.007,68.673 183.007,69.85 182.245,70.612 179.07,70.612 177.292,68.834 ; v1(196.785,66.547) 200.28,66.547 203.327,69.594 203.577,69.594 203.579,69.596 205.867,69.596 209.549,69.596 C117.2@210.756,68.389 ; v1(210.756,66.484) C115.2@210.947,66.675
  Bottom Layer w0.254: v1(184.404,69.977) 183.1,68.673 C107.2@183.1,68.58 v1(183.1,66.675) 184.561,65.214 v1(184.561,64.516) ; v1(191.897,68.58) 191.516,68.58 191.897,68.961 191.897,69.865 ; v1(198.135,69.865) 196.785,68.515 C112.2@196.785,68.452 v1(196.785,66.547) 198.246,65.086 v1(198.246,64.388) ; 205.867,69.596 206.009,69.454 v1(206.009,68.565) ; v1(212.06,70.007) 212.06,69.693 C117.2@210.756,68.389 v1(210.756,66.484) 212.217,65.023 v1(212.217,64.325)
+6V_IA1: C69.2 C70.2 C76.2 C77.2 D19.2 U10.2 | length 16.7
  Top Layer w0.254: D19.2@308.356,73.173 308.356,78.423 C70.2@308.293,78.486 306.451,80.328 306.451,83.566 U10.2@307.801,83.566 309.372,83.566 v1(309.626,83.82)
  Bottom Layer w0.254: v1(309.626,83.82) C77.2@311.912,83.82
+6V_IA2: C179.2 C180.2 C186.2 C187.2 D55.2 U28.2 | length 16.7
  Top Layer w0.254: D55.2@118.244,72.538 118.244,77.788 C180.2@118.181,77.851 116.339,79.693 116.339,82.931 U28.2@117.689,82.931 119.26,82.931 v1(119.514,83.185)
  Bottom Layer w0.254: v1(119.514,83.185) C187.2@121.8,83.185
+6V_IB1: C19.2 C20.2 C26.2 C27.2 D3.2 U2.2 | length 16.7
  Top Layer w0.254: D3.2@270.263,72.538 270.263,77.788 C20.2@270.2,77.851 268.358,79.693 268.358,82.931 U2.2@269.708,82.931 271.279,82.931 v1(271.533,83.185)
  Bottom Layer w0.254: v1(271.533,83.185) C27.2@273.819,83.185
+6V_IB2: C154.2 C155.2 C161.2 C162.2 D47.2 U24.2 | length 16.7
  Top Layer w0.254: D47.2@81.026,72.538 81.026,77.788 C155.2@80.963,77.851 79.121,79.693 79.121,82.931 U24.2@80.471,82.931 82.042,82.931 v1(82.296,83.185)
  Bottom Layer w0.254: v1(82.296,83.185) C162.2@84.582,83.185
+6V_IC1: C44.2 C45.2 C51.2 C52.2 D11.2 U6.2 | length 16.7
  Top Layer w0.254: D11.2@232.163,72.538 232.163,77.788 C45.2@232.1,77.851 230.258,79.693 230.258,82.931 U6.2@231.608,82.931 233.179,82.931 v1(233.433,83.185)
  Bottom Layer w0.254: v1(233.433,83.185) C52.2@235.719,83.185
+6V_IC2: C129.2 C130.2 C136.2 C137.2 D39.2 U20.2 | length 17.2
  Top Layer w0.254: D39.2@42.799,72.538 42.799,77.788 C130.2@42.736,77.851 42.037,77.851 40.894,78.994 40.894,82.931 U20.2@42.244,82.931 43.815,82.931 v1(44.069,83.185)
  Bottom Layer w0.254: v1(44.069,83.185) C137.2@46.355,83.185
+6V_PH: C89.2 C90.2 C96.2 C97.2 D25.2 U13.2 | length 16.7
  Top Layer w0.254: D25.2@148.844,72.531 148.844,77.781 C90.2@148.781,77.844 146.939,79.686 146.939,82.924 U13.2@148.289,82.924 149.86,82.924 v1(150.114,83.178)
  Bottom Layer w0.254: v1(150.114,83.178) C97.2@152.4,83.178
-5V_IA1: C81.2 C82.2 D17.1 D18.1 D23.K D24.2 FB12.2 | length 64.7
  Top Layer w0.2: v1(295.656,70.358) 295.783,70.231 D18.1@296.926,70.231 ; v1(302.133,71.374) 302.287,71.528 302.287,87.029 v1(302.634,87.376) ; D17.1@302.26,68.677 v1(303.56,68.677) ; v1(316.349,89.534) FB12.2@323.215,89.534
  Top Layer w0.254: FB12.2@323.215,89.534 323.215,94.487 C81.2@323.597,94.869 323.597,102.25 D23.K@323.963,102.616
  Bottom Layer w0.2: v1(295.656,70.358) 296.672,71.374 v1(302.133,71.374) 303.149,71.374 303.579,70.944 303.579,68.696 v1(303.56,68.677) ; v1(302.634,87.376) 302.507,87.376 304.665,89.534 v1(316.349,89.534)
-5V_IA2: C191.2 C192.2 D53.1 D54.1 D59.K D60.2 FB29.2 | length 65
  Top Layer w0.2: v1(105.283,69.342) 105.298,69.357 D54.1@106.912,69.357 ; D53.1@112.141,67.915 v1(112.679,67.915) ; v1(112.141,70.739) 112.345,70.739 112.522,70.916 v1(112.522,86.741) ; v1(126.237,88.899) FB29.2@133.103,88.899
  Top Layer w0.254: FB29.2@133.103,88.899 133.103,93.852 C191.2@133.485,94.234 133.485,101.615 D59.K@133.851,101.981
  Bottom Layer w0.2: v1(105.283,69.342) 106.68,70.739 v1(112.141,70.739) 112.272,70.739 113.665,69.346 113.665,68.901 v1(112.679,67.915) ; v1(112.522,86.741) 112.395,86.741 114.553,88.899 v1(126.237,88.899)
-5V_IB1: C31.2 C32.2 D1.1 D2.1 D7.K D8.2 FB4.2 | length 66.3
  Top Layer w0.2: v1(257.302,69.215) D2.1@258.953,69.215 ; v1(263.779,70.866) 264.541,71.628 v1(264.541,86.741) ; D1.1@264.033,67.915 264.257,67.691 v1(265.176,67.691) ; v1(278.256,88.899) FB4.2@285.122,88.899
  Top Layer w0.254: FB4.2@285.122,88.899 285.122,93.852 C31.2@285.504,94.234 285.504,101.615 D7.K@285.87,101.981
  Bottom Layer w0.2: v1(257.302,69.215) 257.175,69.215 258.826,70.866 v1(263.779,70.866) 263.906,70.739 264.795,70.739 265.684,69.85 265.684,68.199 v1(265.176,67.691) ; v1(264.541,86.741) 264.414,86.741 266.572,88.899 v1(278.256,88.899)
-5V_IB2: C166.2 C167.2 D45.1 D46.1 D51.K D52.2 FB25.2 | length 63
  Top Layer w0.2: v1(68.961,69.723) 69.813,69.723 D46.1@69.828,69.738 ; D45.1@74.952,68.311 v1(75.326,68.311) ; v1(75.057,70.866) 75.254,70.866 75.304,70.916 v1(75.304,86.741) ; v1(89.019,88.899) FB25.2@95.885,88.899
  Top Layer w0.254: FB25.2@95.885,88.899 95.885,93.852 C166.2@96.267,94.234 96.267,101.615 D51.K@96.633,101.981
  Bottom Layer w0.2: v1(68.961,69.723) 70.104,70.866 v1(75.057,70.866) 76.073,70.866 76.23,70.709 76.23,69.215 v1(75.326,68.311) ; v1(75.304,86.741) 75.177,86.741 77.335,88.899 v1(89.019,88.899)
-5V_IC1: C56.2 C57.2 D9.1 D10.1 D15.K D16.2 FB8.2 | length 66.6
  Top Layer w0.2: v1(219.202,69.342) 219.217,69.357 D10.1@220.831,69.357 ; D9.1@226.06,68.042 226.157,67.945 v1(227.457,67.945) ; v1(226.237,70.866) 226.237,71.12 226.441,70.916 v1(226.441,86.741) ; v1(240.156,88.899) FB8.2@247.022,88.899
  Top Layer w0.254: FB8.2@247.022,88.899 247.022,93.852 C56.2@247.404,94.234 247.404,101.615 D15.K@247.77,101.981
  Bottom Layer w0.2: v1(219.202,69.342) 220.726,70.866 v1(226.237,70.866) 227.33,70.866 227.838,70.358 227.838,68.326 v1(227.457,67.945) ; v1(226.441,86.741) 226.314,86.741 228.472,88.899 v1(240.156,88.899)
-5V_IC2: C141.2 C142.2 D37.1 D38.1 D43.K D44.2 FB21.2 | length 65
  Top Layer w0.2: v1(30.48,69.342) D38.1@31.75,69.342 ; D37.1@36.515,68.057 v1(37.069,68.057) ; v1(36.703,70.739) 36.9,70.739 37.077,70.916 v1(37.077,86.741) ; v1(50.792,88.899) FB21.2@57.658,88.899
  Top Layer w0.254: FB21.2@57.658,88.899 57.658,93.852 C141.2@58.04,94.234 58.04,101.615 D43.K@58.406,101.981
  Bottom Layer w0.2: v1(30.48,69.342) 31.877,70.739 v1(36.703,70.739) 37.53,70.739 38.481,69.788 38.481,68.58 37.958,68.057 v1(37.069,68.057) ; v1(37.077,86.741) 36.95,86.741 39.108,88.899 v1(50.792,88.899)
-5V_LV: C218.1 C219.1 C220.1 C221.1 C232.1 C233.1 C234.1 C235.1 C246.1 C247.1 C248.1 C249.1 C258.1 C259.1 C265.1 C266.1 C272.1 C273.1 R179.2 U33.6 U34.6 U35.6 U36.6 U37.6 U38.6 U40.6 U41.6 U42.6 | length 307.3
  Top Layer w0.2: U40.6@126.049,32.131 v1(128.398,32.131) ; U41.6@147.258,32.131 147.766,32.131 147.893,32.258 v1(149.607,32.258) ; U42.6@168.848,32.131 170.816,32.131 v1(171.197,32.512) ; U33.6@190.691,32.766 v1(193.04,32.766) ; U35.6@211.9,32.766 212.408,32.766 212.535,32.893 v1(214.249,32.893) ; U37.6@233.49,32.766 235.458,32.766 v1(235.839,33.147) ; v1(246.888,26.289) v1@247.015,26.416 ; U34.6@256.604,32.766 v1(258.953,32.766) ; U36.6@277.813,32.766 278.321,32.766 278.448,32.893 v1(280.162,32.893) ; U38.6@299.403,32.766 301.371,32.766 v1(301.752,33.147)
  Top Layer w0.4: R179.2@101.219,26.416 v2(101.346,26.416) ; v1(133.35,22.098) v1(133.35,25.527) ; v1(138.685,25.654) v1(141.479,25.654) ; v1(159.132,25.654) v1(163.069,25.654) ; v1(182.499,26.416) v1(184.658,26.416) ; v1(203.327,26.289) v1(206.121,26.289) ; v1(223.774,26.289) v1(227.711,26.289) ; v1@247.015,26.416 v1(251.206,26.416) ; v1(269.24,26.289) v1(272.034,26.289) ; v1(289.687,26.289) v1(293.624,26.289)
  Bottom Layer w0.2: 128.525,25.654 128.398,25.781 v1(128.398,32.131) 128.334,32.131 C258.1@128.398,32.195 C259.1@129.922,32.195 ; 149.607,25.654 v1(149.607,32.258) ; C265.1@149.607,32.512 C266.1@151.131,32.512 ; 171.197,25.909 v1(171.197,32.512) C272.1@172.975,32.512 ; v1@193.167,26.289 v1(193.04,26.416) v1(193.04,32.766) 192.976,32.766 C218.1@193.04,32.83 C219.1@194.564,32.83 ; 214.249,26.289 v1(214.249,32.893) ; C232.1@214.249,33.147 C233.1@215.773,33.147 ; 235.839,26.289 v1(235.839,33.147) C246.1@237.617,33.147 ; 258.953,26.416 v1(258.953,32.766) 258.889,32.766 C220.1@258.953,32.83 C221.1@260.477,32.83 ; 280.162,26.289 v1(280.162,32.893) ; C234.1@280.162,33.147 C235.1@281.686,33.147 ; 301.752,26.289 v1(301.752,33.147) C248.1@303.53,33.147
  Bottom Layer w0.4: v2(101.346,26.416) 102.489,26.416 106.807,22.098 v1(133.35,22.098) ; 128.525,25.654 v1@133.223,25.654 ; v1(133.35,25.527) v1@133.223,25.654 ; v1(138.685,25.654) v1@133.223,25.654 ; v1(141.479,25.654) 149.607,25.654 v1(159.132,25.654) ; v1(163.069,25.654) 170.942,25.654 171.197,25.909 171.704,26.416 v1(182.499,26.416) ; v1(184.658,26.416) v1(193.04,26.416) ; v1@193.167,26.289 v1(203.327,26.289) ; v1(206.121,26.289) 214.249,26.289 v1(223.774,26.289) ; v1(227.711,26.289) 235.839,26.289 v1(246.888,26.289) ; v1(251.206,26.416) 258.953,26.416 269.113,26.416 v1(269.24,26.289) ; v1(272.034,26.289) 280.162,26.289 v1(289.687,26.289) ; v1(293.624,26.289) 301.752,26.289
-5V_LV_PRE: C195.2 C197.1 C203.1 C204.1 C205.1 PS1.5 R179.1 | length 32
  Bottom Layer w0.762: C195.2@70.122,26.924 PS1.5@79.121,26.924 82.931,23.114 C197.1@82.931,22.987 85.153,22.987 C205.1@85.598,22.542 C203.1@90.424,22.542 94.678,22.542 98.552,26.416 v2(98.619,26.416)
-5V_PH: C101.2 C102.2 D29.K D30.2 D31.1 D32.1 D33.1 D34.1 D35.1 D36.1 FB14.2 | length 92.1
  Top Layer w0.2: FB14.2@163.703,88.892 v1(164.219,88.892) ; v1(177.673,71.374) 177.673,70.866 178.562,69.977 178.592,70.007 D32.1@178.816,70.007 ; D31.1@183.896,68.677 185.513,68.677 187.198,70.362 187.198,71.374 ; v1(183.896,71.374) 187.198,71.374 ; v1(188.722,71.374) 187.198,71.374 ; v1@192.024,71.374 v1(192.088,71.31) 192.51,70.888 D34.1@192.51,69.865 ; v1(197.739,71.501) 200.025,71.501 ; D33.1@197.761,68.565 198.863,68.565 200.025,69.727 200.025,71.501 ; v1(203.327,71.501) 200.025,71.501 ; v1(206.375,71.247) 206.375,69.97 D36.1@206.48,69.865 ; D35.1@211.582,68.707 213.233,68.707 213.487,68.961 213.487,70.485 212.598,71.374 v1(211.836,71.374)
  Top Layer w0.254: FB14.2@163.703,88.892 163.703,93.845 C101.2@164.085,94.227 164.085,101.608 D29.K@164.451,101.974
  Bottom Layer w0.2: v1(164.219,88.892) 164.219,84.066 176.911,71.374 v1(177.673,71.374) v1(183.896,71.374) ; v1(188.722,71.374) 192.024,71.374 v1(192.088,71.31) 197.548,71.31 v1(197.739,71.501) ; v1(203.327,71.501) 206.121,71.501 v1(206.375,71.247) 211.709,71.247 v1(211.836,71.374)
-6V_IA1: C74.1 C75.1 C78.2 C79.2 D22.1 U12.5 U12.8 | length 25.6
  Top Layer w0.254: C75.1@314.071,78.486 314.325,78.232 D22.1@314.325,73.046 317.86,73.046 319.786,71.12 ; U12.5@321.392,73.152 321.392,72.726 319.786,71.12 ; C79.2@327.533,73.026 327.407,73.152 U12.8@323.342,73.152 323.342,70.572 322.747,69.977 320.929,69.977 319.786,71.12
-6V_IA2: C184.1 C185.1 C188.2 C189.2 D58.1 U30.5 U30.8 | length 25.6
  Top Layer w0.254: C185.1@123.959,77.851 124.213,77.597 D58.1@124.213,72.411 127.748,72.411 129.674,70.485 ; U30.5@131.28,72.517 131.28,72.091 129.674,70.485 ; C189.2@137.421,72.391 137.295,72.517 U30.8@133.23,72.517 133.23,69.937 132.635,69.342 130.817,69.342 129.674,70.485
-6V_IB1: C24.1 C25.1 C28.2 C29.2 D6.1 U4.5 U4.8 | length 25.6
  Top Layer w0.254: C25.1@275.978,77.851 276.232,77.597 D6.1@276.232,72.411 279.767,72.411 281.693,70.485 ; U4.5@283.299,72.517 283.299,72.091 281.693,70.485 ; C29.2@289.44,72.391 289.314,72.517 U4.8@285.249,72.517 285.249,69.937 284.654,69.342 282.836,69.342 281.693,70.485
-6V_IB2: C159.1 C160.1 C163.2 C164.2 D50.1 U26.5 U26.8 | length 25.6
  Top Layer w0.254: C160.1@86.741,77.851 86.995,77.597 D50.1@86.995,72.411 90.53,72.411 92.456,70.485 ; U26.5@94.062,72.517 94.062,72.091 92.456,70.485 ; C164.2@100.203,72.391 100.077,72.517 U26.8@96.012,72.517 96.012,69.937 95.417,69.342 93.599,69.342 92.456,70.485
-6V_IC1: C49.1 C50.1 C53.2 C54.2 D14.1 U8.5 U8.8 | length 25.6
  Top Layer w0.254: C50.1@237.878,77.851 238.132,77.597 D14.1@238.132,72.411 241.667,72.411 243.593,70.485 ; U8.5@245.199,72.517 245.199,72.091 243.593,70.485 ; C54.2@251.34,72.391 251.214,72.517 U8.8@247.149,72.517 247.149,69.937 246.554,69.342 244.736,69.342 243.593,70.485
-6V_IC2: C134.1 C135.1 C138.2 C139.2 D42.1 U22.5 U22.8 | length 25.6
  Top Layer w0.254: C135.1@48.514,77.851 48.768,77.597 D42.1@48.768,72.411 52.303,72.411 54.229,70.485 ; U22.5@55.835,72.517 55.835,72.091 54.229,70.485 ; C139.2@61.976,72.391 61.85,72.517 U22.8@57.785,72.517 57.785,69.937 57.19,69.342 55.372,69.342 54.229,70.485
-6V_PH: C94.1 C95.1 C98.2 C99.2 D28.1 U15.5 U15.8 | length 25.6
  Top Layer w0.254: C95.1@154.559,77.844 154.813,77.59 D28.1@154.813,72.404 158.348,72.404 160.274,70.478 ; U15.5@161.88,72.51 161.88,72.084 160.274,70.478 ; C99.2@168.021,72.384 167.895,72.51 U15.8@163.83,72.51 163.83,69.93 163.235,69.335 161.417,69.335 160.274,70.478
GND_IA1: C60.1 C62.1 C65.2 C69.1 C70.1 C71.1 C72.1 C73.1 C74.2 C75.2 C76.1 C77.1 C78.1 C79.1 C81.1 C82.1 C83.1 C84.1 D21.2 D24.1 FB10.1 R1.2 R33.1 R35.1 R36.1 T3.4 U9.4 U10.1 U12.3 U12.4 U12.9 | length 406.7
  Top Layer w0.2: U9.4@297.732,65.306 296.538,66.5 v1(296.538,67.183) 295.275,67.183 293.624,68.834 293.624,78.516 v1(297.783,82.675) ; U10.1@307.801,82.616 309.137,81.28 v1(310.127,81.28)
  Top Layer w0.254: C71.1@309.943,81.025 C70.1@309.943,78.486 ; C75.2@312.421,78.486 C70.1@309.943,78.486 ; v1(313.436,83.058) R36.1@319.215,83.058 ; C73.1@313.824,90.424 313.824,92.512 C72.1@313.245,93.091 313.245,95.657 D21.2@312.509,96.393 314.922,98.806 R33.1@317.754,98.806 R33.1@317.754,98.806 R35.1@320.167,98.807 R35.1@320.167,98.807 v1(320.16,98.806) ; C84.1@319.659,74.548 320.363,75.252 U12.9@322.367,75.252 ; C65.2@321.183,63.881 318.763,66.301 T3.4@314.327,66.301 316.738,68.712 316.738,71.628 313.309,71.628 312.484,72.453 C74.2@312.484,75.819 C69.1@309.943,75.819 C70.1@309.943,78.486 ; U12.3@322.042,77.352 U12.4@321.392,77.352 ; v1(322.644,85.407) 322.453,85.598 321.691,84.836 320.993,84.836 R36.1@319.215,83.058 ; C82.1@325.374,92.456 v1(325.628,92.71) 325.247,93.091 C81.1@325.247,94.869 325.882,95.504 D24.1@325.882,97.917 v1(325.755,98.044) ; C79.1@327.533,74.676 322.943,74.676 U12.9@322.367,75.252 ; R36.1@319.215,83.058 321.392,80.881 U12.4@321.392,77.352 ; U12.4@321.392,77.352 321.392,76.227 U12.9@322.367,75.252
  Top Layer w0.4: R1.2@225.067,293.825 228.505,290.387 228.505,270.097 252.095,246.507 252.095,185.928 257.81,180.213 257.81,113.792 263.271,108.331 297.688,108.331 299.117,106.902 299.117,84.009 v1(297.783,82.675)
  Bottom Layer w0.2: 296.665,67.715 299.205,67.715 C62.1@299.307,67.614 C60.1@299.307,69.544 ; v1(297.783,82.675) 298.288,82.17 C76.1@309.626,82.17 C77.1@311.912,82.17
  Bottom Layer w0.254: C76.1@309.626,82.17 309.626,81.852 310.127,81.351 v1(310.127,81.28) ; C77.1@311.912,82.17 312.294,82.17 313.182,83.058 v1(313.436,83.058) ; v1(320.16,98.806) 324.993,98.806 v1(325.755,98.044) ; v1(322.644,85.407) 321.31,86.741 321.31,88.392 v1(325.628,92.71)